# EAGLE board Brew-Bubbles (EAGLE 9.5.2)
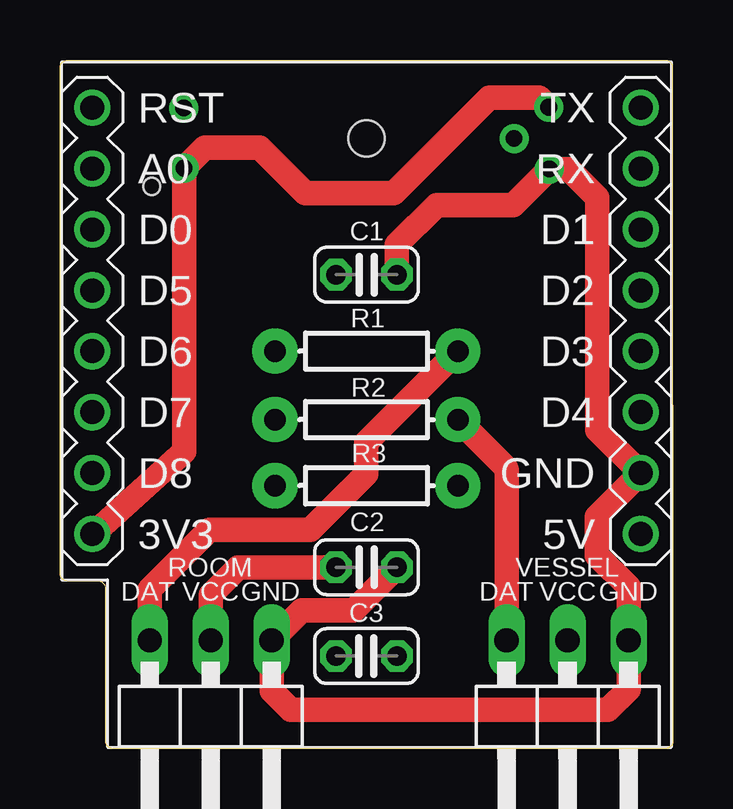
[diagram p0: board, top side]
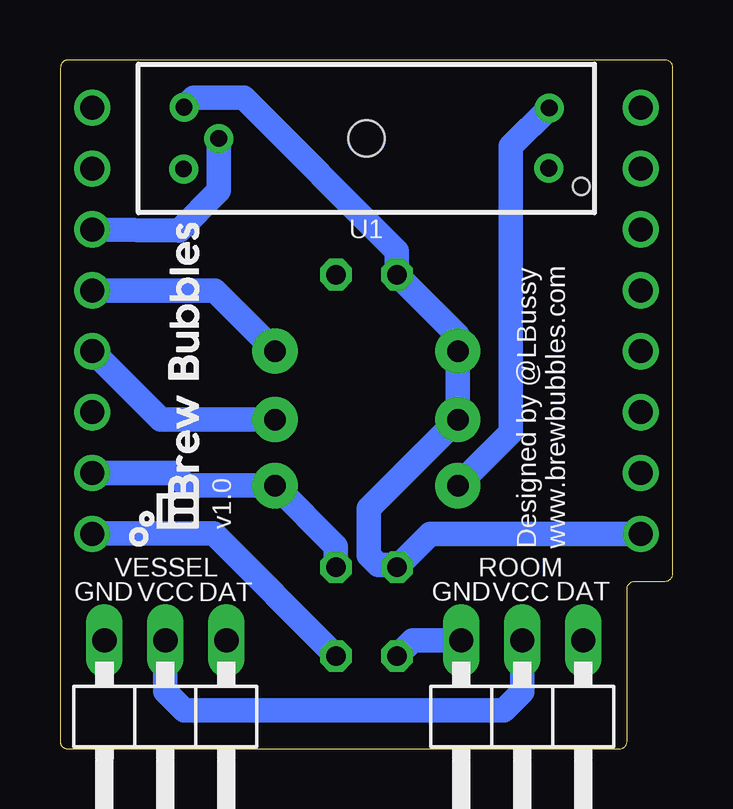
[diagram p1: board, bottom side, seen from below]

Size 25.54 x 28.72 mm. Coordinates in mm from the lower left corner, seen from the top.
Outline: 0.32,28.71 25.2,28.72 arc-90 25.52,28.4 25.54,0.32 arc-90 25.22,0 2.23,0 arc-90 1.91,0.32 1.91,6.67 arc90 1.59,6.99 0.32,6.99 arc-90 0,7.31 0,28.39 arc-90 0.32,28.71
Copper layers (1*16): Top 0.035mm / dielectric 1.5mm / Bottom 0.035mm
Design rules "default": minimum track width 6mil, minimum drill 0.35mm, track to track 6mil, track to pad 6mil, pad to pad 6mil, via to via 6mil, smd to smd 6mil, copper to edge 40mil, drill to drill 6mil, minimum pad ring 10mil, minimum via ring 8mil, stop-mask expansion 4mil, vias tented up to drill 0mil, thermal gap 10mil

## Footprints (pad centres in the part's own frame; a part is rotated, then mirrored left to right if it is on the bottom)
C025-024X044 = drill 0.813 octagon: 1 -1.27,0; 2 1.27,0
AXIAL-0.3 = drill 0.9 pad 1.88: P$1 -3.81,0; P$2 3.81,0
1X03/90 = drill 1.016 long: 1 -2.54,-3.81; 2 0,-3.81; 3 2.54,-3.81
GP1A57HR = drill 0.7: 1 -7.6,1.24; 2 -7.62,-1.27; 3 7.6,-1.3; 4 6.15,0; 5 7.62,1.27 | hole 1.5: 0,0 | hole 0.7: -8.95,2
WEMOS-D1-MINI-SHIELD = drill 1: JP1.1 -11.43,12.065; JP1.2 -11.43,9.525; JP1.3 -11.43,6.985; JP1.4 -11.43,4.445; JP1.5 -11.43,1.905; JP1.6 -11.43,-0.635; JP1.7 -11.43,-3.175; JP1.8 -11.43,-5.715; JP2.1 11.43,12.065; JP2.2 11.43,9.525; JP2.3 11.43,6.985; JP2.4 11.43,4.445; JP2.5 11.43,1.905; JP2.6 11.43,-0.635; JP2.7 11.43,-3.175; JP2.8 11.43,-5.715

## Placement (x,y rotation side)
C1  0.1μF  [C025-024X044]  12.77,19.77 0 top
C2  0.1μF  [C025-024X044]  12.77,7.57 0 top
C3  0.1μF  [C025-024X044]  12.77,3.87 180 top
R1  2.2kΩ  [AXIAL-0.3]  12.77,16.58 180 top
R2  2.2kΩ  [AXIAL-0.3]  12.77,13.73 180 top
R3  150Ω  [AXIAL-0.3]  12.77,10.97 180 top
ROOM  3PIN90  [1X03/90]  6.28,0.71 180 top
ROOM1  3PIN90  [1X03/90]  6.28,0.71 180 bottom
U1  GP1A57HR  [GP1A57HR]  12.77,25.45 180 bottom
U2  WEMOS-D1-MINI  [WEMOS-D1-MINI-SHIELD]  12.77,14.67 0 top
VESSEL  3PIN90  [1X03/90]  21.15,0.71 180 top
VESSEL1  3PIN90  [1X03/90]  21.15,0.71 180 bottom

## Library data of the parts
C1-C3 = rcl; SPICEPREFIX: C
R1-R3 = SparkFun-Resistors; PROD_ID: RES-8371
ROOM ROOM1 VESSEL VESSEL1 = pinhead
U1 = SparkFun-Sensors; SF_ID: SEN-09299
U2 = diy-modules

## Nets
3V3: C1.1 C2.1 R1.P$2 R2.P$2 ROOM.2 U1.1 U1.3 U2.JP1.8 VESSEL.2
5V: C3.1 U2.JP2.8
D1: U1.4 U2.JP2.3
D2: R1.P$1 ROOM.3 U2.JP2.4
D3: R2.P$1 U2.JP2.5 VESSEL.3
GND: C1.2 C2.2 C3.2 R3.P$1 ROOM.1 U1.5 U2.JP2.7 VESSEL.1
PD1: R3.P$2 U1.2

## Tracks (layer width: path | path; a pad name or v marks a point on that pad's centre or on a via)
3V3
  Top 1.016: U2.JP1.8 1.34,8.91 5.17,12.39 U1.1 6.03,25.07 8.33,25.07 10.23,23.16 13.9,23.16 17.89,27.15 19.97,27.15 U1.3 | C2.1 7.43,7.57 6.28,6.42 ROOM.2
  Bottom 0.152: C2.1 11.6,7.67
  Bottom 1.016: U1.3 19.97,27.15 17.89,27.15 11.5,20.76 C1.1 8.96,17.23 R1.P$2 R2.P$2 12.67,10.02 12.67,8.07 12.27,7.67 11.6,7.67 | ROOM.2 6.28,2.37 7.05,1.6 20.36,1.6 21.15,2.39 VESSEL.2 | U2.JP1.8 10.12,8.96 C2.1
5V
  Bottom 0.152: 24.18,8.97 U2.JP2.8
  Bottom 1.016: 24.18,8.97 19.67,8.97 19.47,8.97 19.14,8.97 C3.1
D1
  Bottom 1.016: U1.4 18.92,23.27 20.58,21.61 U2.JP2.3
D2
  Top 1.016: ROOM.3 3.74,6.64 6.22,9.12 10.42,9.12 12.77,11.47 12.77,12.77 R1.P$1
  Bottom 1.016: R1.P$1 19.1,19.1 19.84,19.11 U2.JP2.4
D3
  Top 0.152: 18.57,11.74 18.57,11.67 18.61,11.63
  Top 1.016: R2.P$1 18.57,11.74 | VESSEL.3 18.61,11.63
  Bottom 1.016: U2.JP2.5 21.34,13.73 R2.P$1
GND
  Top 1.016: C1.2 14.04,21.03 15.69,22.68 18.89,22.68 U1.5 21.19,24.18 22.39,22.98 22.39,13.29 U2.JP2.7 22.37,9.67 22.37,8.07 23.69,6.75 VESSEL.1 23.69,2.48 22.83,1.62 9.62,1.62 8.82,2.42 ROOM.1 10.07,5.77 12.24,5.77 C2.2
  Bottom 0.152: 18.67,10.97
  Bottom 1.016: C2.2 14.04,8.43 R3.P$1 18.67,10.97 | ROOM.1 10.85,4.52 C3.2 | 18.67,10.97 20.27,10.97 20.79,11.5 U2.JP2.7
PD1
  Bottom 1.016: R3.P$2 6.75,13.18 6.75,25.12 U1.2

## Text on the board
tNames: DAT | VCC | GND | DAT | VCC | GND
bNames: v1.0 | Designed by @LBussy / www.brewbubbles.com | ROOM | VESSEL | DAT | VCC | GND | DAT | VCC | GND